# EAGLE board frontppanmel (EAGLE 8.1.0)
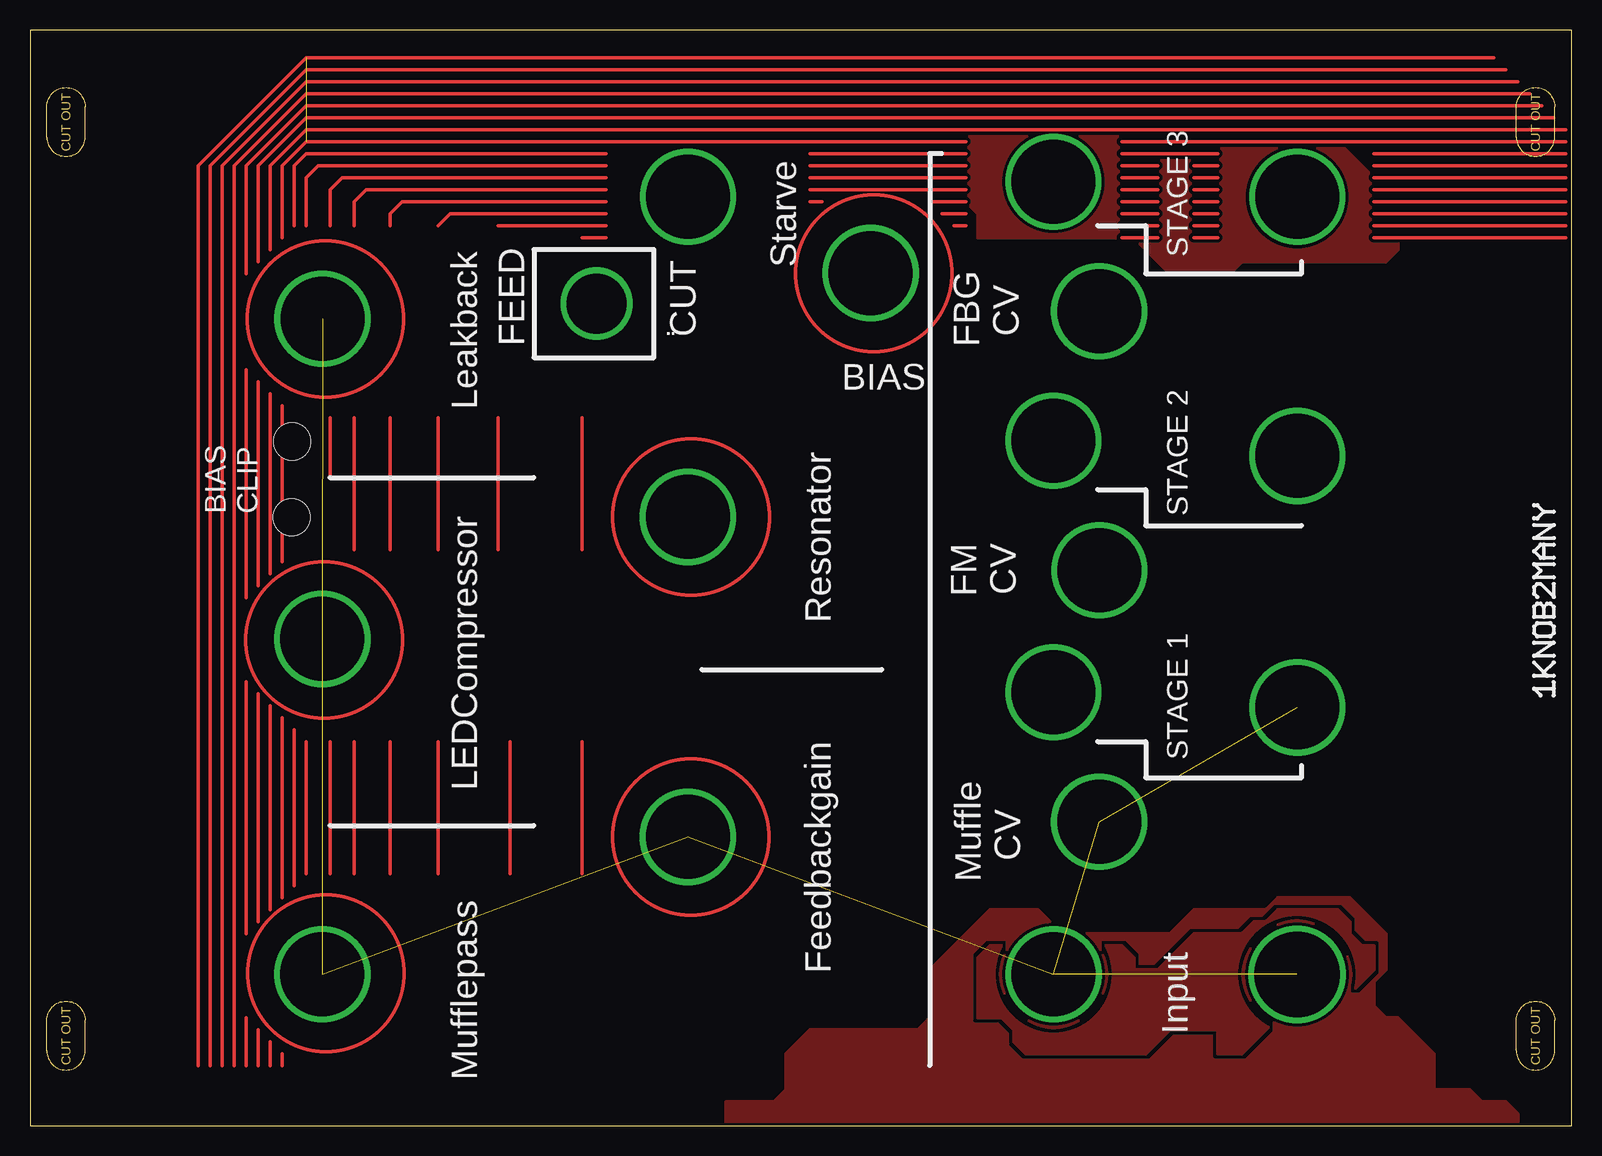
[diagram p0: board, top side]

Size 128.5 x 91.3 mm. Coordinates in mm from the lower left corner, seen from the top.
Outline: 0,91.3 0,0 128.5,0 128.5,91.3 0,91.3
Copper layers (1*16): Top 0.035mm / dielectric 1.5mm / Bottom 0.035mm
Design rules "dirt_cheap_dirty_boards.v1 *": minimum track width 5mil, minimum drill 12mil, track to track 5mil, track to pad 5mil, pad to pad 5mil, via to via 5mil, smd to smd 0mil, copper to edge 10mil, drill to drill 10mil, minimum pad ring 10mil, minimum via ring 6mil, stop-mask expansion 2mil, vias tented up to drill 25mil, thermal gap 10mil
Net classes: 0 default: width 0.203 mm; 1 power: width 0.406 mm; 2 ground: width 0.406 mm; 3 noise_circuit: drill 1 mm
Holes 3.1 mm at 21.82,50.7 21.86,57.02

## Placement (x,y rotation side)
U$1  [SLOT_HOLE]  3,83.64 90 top
U$2  [SLOT_HOLE]  3,7.5 90 top
U$3  [SLOT_HOLE]  125.5,83.64 90 top
U$4  [SLOT_HOLE]  125.5,7.5 90 top

## Library data of the parts
U$1-U$4 = MusicThingModular

## Tracks (layer width: path | path; a pad name or v marks a point on that pad's centre or on a via)
DECO  (7 unrouted)
  Top 0.305: 14,5 14,80 23,89 122,89 | 15,5 15,80 23,88 123,88 | 16,5 16,80 23,87 124,87 | 17,5 17,80 23,86 125,86 | 18,71 18,80 23,85 126,85 | 19,72 19,80 23,84 127,84 | 20,73 20,80 23,83 128,83 | 21,74 21,80 23,82 78,82
GND  (via drill 7, 7.1)  (7 unrouted)
  other vias: 105.65,34.85 24.37,40.55 24.38,67.23 24.37,12.62 54.84,24.05 105.62,12.59 85.33,12.62 89.13,25.32
N$1  (via drill 7)
  other vias: 85.32,36.11
N$2  (via drill 7)
  other vias: 89.13,46.28
N$3  (via drill 7)
  other vias: 85.32,57.07
N$4  (via drill 7)
  other vias: 89.13,67.86
N$5  (via drill 7)
  other vias: 85.32,78.66
N$6  (via drill 7)
  other vias: 105.64,77.4
N$7  (via drill 7)
  other vias: 105.63,55.8
N$8  (via drill 7)
  other vias: 54.84,50.72
N$9  (via drill 7)
  other vias: 70.08,71.05
N$10  (via drill 7)
  other vias: 54.84,77.39
N$11
  Top 0.305: 21,19 21,34
N$12  (via drill 5)
  other vias: 47.24,68.5
N$13
  Top 0.305: 18,16 18,37
N$16
  Top 0.305: 20,18 20,35
N$17
  Top 0.305: 19,17 19,36
N$18
  Top 0.305: 21,5 21,6
N$19
  Top 0.305: 20,5 20,7
N$20
  Top 0.305: 19,5 19,8
N$21
  Top 0.305: 18,5 18,9
N$22
  Top 0.305: 21,47 21,60
N$23
  Top 0.305: 20,46 20,61
N$24
  Top 0.305: 19,45 19,62
N$25
  Top 0.305: 18,44 18,63
N$26
  Top 0.305: 91,82 128,82
N$27
  Top 0.305: 65,81 78,81
N$28
  Top 0.305: 65,80 78,80
N$29
  Top 0.305: 65,79 78,79
N$30
  Top 0.305: 65,78 78,78
N$31
  Top 0.305: 65,77 66,77
N$32
  Top 0.305: 75,77 78,77
N$33
  Top 0.305: 22,33 22,20
N$34
  Top 0.305: 23,32 23,21
N$35
  Top 0.305: 25,32 25,21
N$36
  Top 0.305: 27,32 27,21
N$37
  Top 0.305: 30,32 30,21
N$38
  Top 0.305: 34,32 34,21
N$39
  Top 0.305: 76,76 78,76
N$40
  Top 0.305: 40,32 40,21
N$41
  Top 0.305: 25,59 25,54
N$42
  Top 0.305: 77,75 78,75
N$43
  Top 0.305: 91,81 99,81
N$44
  Top 0.305: 91,80 94,80
N$45
  Top 0.305: 30,59 30,48
N$46
  Top 0.305: 91,79 94,79
N$47
  Top 0.305: 34,59 34,48
N$48
  Top 0.305: 91,78 94,78
N$49
  Top 0.305: 39,59 39,48
N$50
  Top 0.305: 27,59 27,48
N$51
  Top 0.305: 22,75 22,80 23,81 48,81
N$52
  Top 0.305: 23,75 23,79 24,80 48,80
N$53
  Top 0.305: 25,75 25,78 26,79 48,79
N$54
  Top 0.305: 27,75 27,77 28,78 48,78
N$55
  Top 0.305: 30,75 30,76 31,77 48,77
N$56
  Top 0.305: 34,75 35,76 48,76
N$57
  Top 0.305: 39,75 48,75
N$58
  Top 0.305: 91,77 94,77
N$59
  Top 0.305: 91,76 94,76
N$60
  Top 0.305: 91,75 94,75
N$61
  Top 0.305: 97,79 99,79
N$62
  Top 0.305: 97,78 99,78
N$63
  Top 0.305: 97,77 99,77
N$64
  Top 0.305: 97,76 99,76
N$65
  Top 0.305: 97,75 99,75
N$66
  Top 0.305: 97,80 99,80
N$67
  Top 0.305: 112,81 128,81
N$68
  Top 0.305: 112,80 128,80
N$69
  Top 0.305: 112,79 128,79
N$70
  Top 0.305: 112,78 128,78
N$71
  Top 0.305: 112,77 128,77
N$72
  Top 0.305: 112,76 128,76
N$73
  Top 0.305: 112,75 128,75
N$74
  Top 0.305: 128,74 112,74
N$75
  Top 0.305: 99,74 97,74
N$76
  Top 0.305: 94,74 91,74
N$78
  Top 0.305: 48,74 46,74
N$79
  pour Top (isolate 0.254): 77,78 77,84 78,85 106,85 114,77 114,73 113,72 101,72 100,71 95,71 92,74 79,74 79,76
N$80
  Top 0.305: 46,48 46,59
N$82
  Top 0.305: 46,21 46,32
N$84
  pour Top (isolate 0.254, rank 2): 58,0 58,2 62,2 63,3 63,6 65,8 74,8 75,9 75,13 77,15 80,18 84,18 86,16 95,16 97,18 103,18 104,19 107,19 110,19 113,16 113,13 112,12 112,10 113,9 114,9 117,6 117,3 120,3 121,2 123,2 124,1 124,0
N$85
  pour Top (isolate 0.813): 80,15 79,14 79,9 81,9 82,8 82,7 83,6 93,6 95,8 99,8 99,6 101,6 104,9 109,9 109,10 112,13 112,15 111,15 110,16 110,17 109,18 104,18 103,17 102,17 101,16 97,16 96,15 94,13 92,13 92,14 91,15
(copper drawn outside any net)
  shapes: Top circle x6

## Text on the board
tPlace: Starve | STAGE 3 | CUT | FEED | FBG / CV | BIAS | Leakback | BIAS / CLIP | STAGE 2 | FM / CV | Resonator | STAGE 1 | LEDCompressor | Muffle / CV | Feedbackgain | Input | Mufflepass